# Allegro board OpenCellular_Connect-1_LED_Life-3_Board.brd
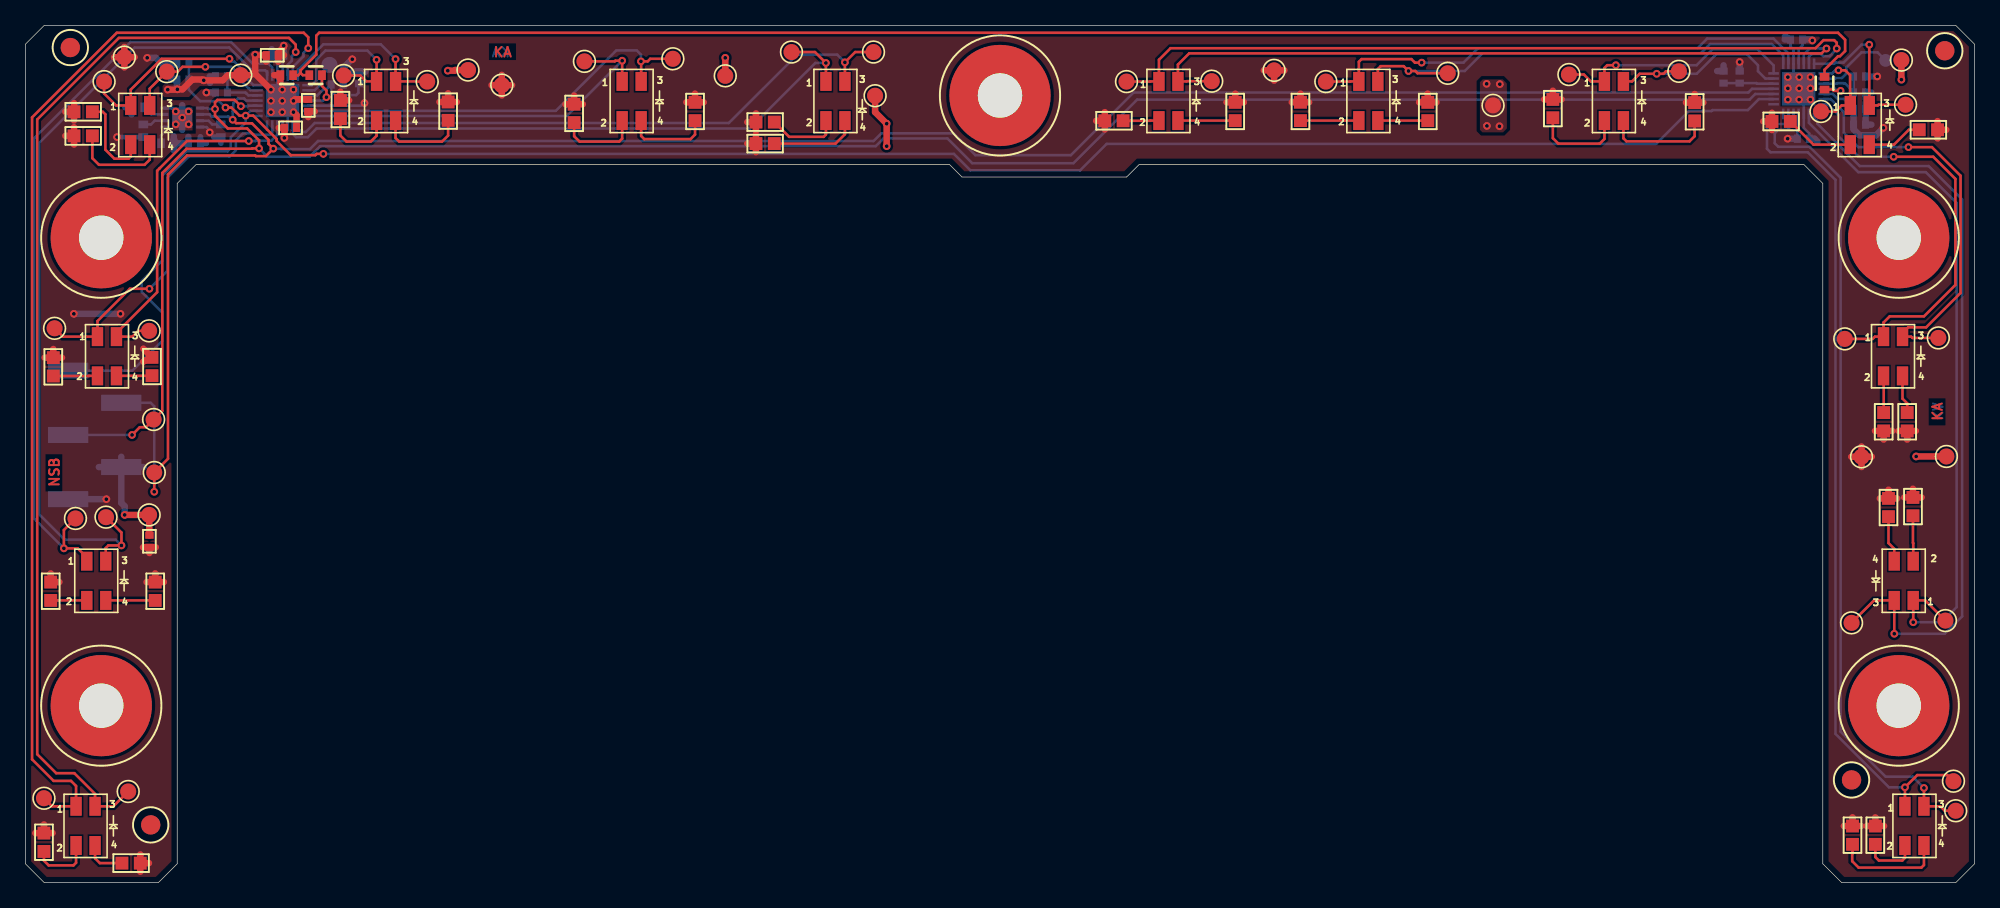
[diagram p0: board, top side]
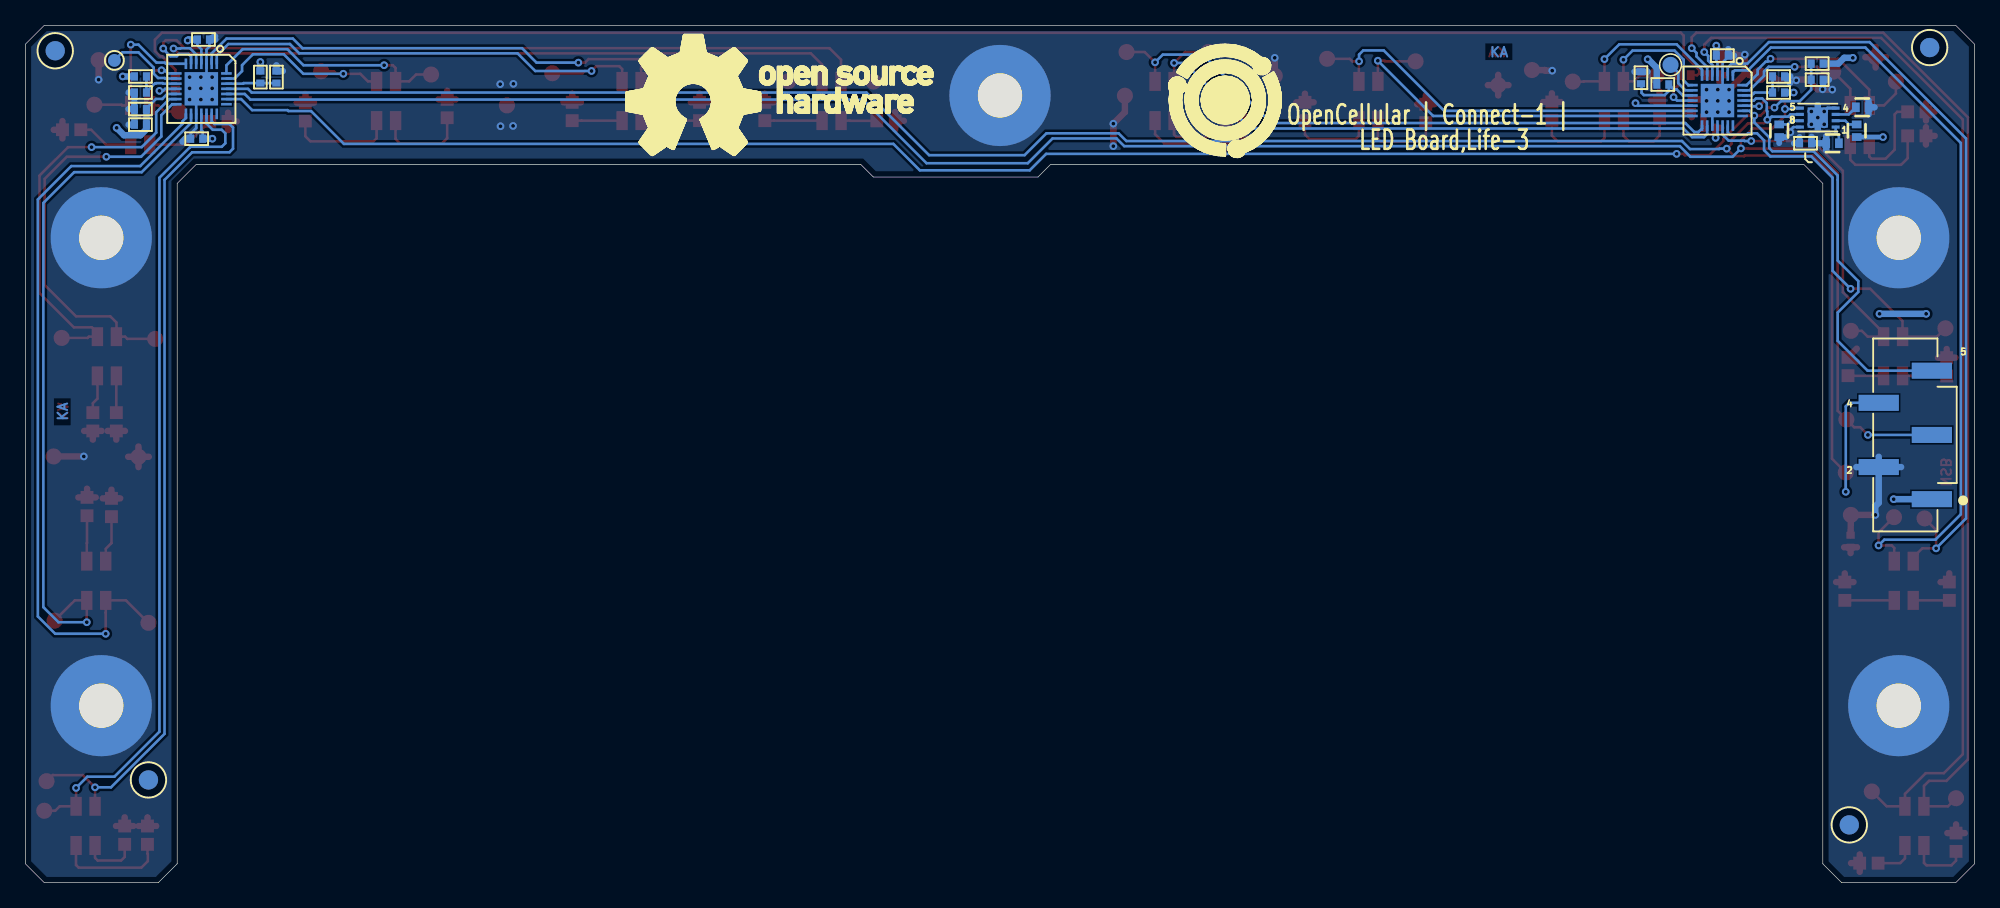
[diagram p1: board, bottom side, seen from below]

Outline 154 x 67.8 mm; copper layers: TOP, BOTTOM. Coordinates in mm from the lower left corner of the outline.
Outline path: 0,66.3 0,1.5 1.5,0 10.5,0 12,1.5 12,55.3 13.5,56.8 73,56.8 74,55.8 87,55.8 88,56.8 140.5,56.8 142,55.3 142,1.5 143.5,0 152.5,0 154,1.5 154,66.3 152.5,67.8 1.5,67.8 0,66.3

## Placement (name value [footprint] x y rotation side)
C1  1uF  [C0402]  19.51 65.43 180 top
C2  0.1uF  [C0402]  22.35 61.47 90 top
C3  0.1uF  [C0402]  12.45 63.5 180 bottom
C4  0.1uF  [C0402]  9.8 27 90 top
C5  0.1uF  [C0402]  20.95 59.69 0 top
C7  0.1uF  [C0402]  19.94 65.41 180 bottom
C8  1uF  [C0402]  144.91 61.18 0 bottom
C9  0.1uF  [C0402]  140.46 58.83 0 bottom
C10  0.1uF  [C0402]  144.91 59.94 0 bottom
C11  0.1uF  [C0402]  139.93 66.67 180 bottom
C1879  0.1uF  [C0402]  13.36 58.47 180 bottom
D8  LED  [SMP4-SBC]  4.76 4.49 0 top
D17  LED  [SMP4-SBC]  5.6 23.87 0 top
D18  LED  [SMP4-SBC]  6.45 41.63 0 top
D19  LED  [SMP4-SBC]  9.08 59.91 0 top
D20  LED  [SMP4-SBC]  28.5 61.81 0 top
D21  LED  [SMP4-SBC]  47.9 61.81 0 top
D22  LED  [SMP4-SBC]  64 61.81 0 top
D23  LED  [SMP4-SBC]  90.31 61.81 0 top
D24  LED  [SMP4-SBC]  125.5 61.81 0 top
D25  LED  [SMP4-SBC]  144.92 59.91 0 top
D26  LED  [SMP4-SBC]  147.55 41.63 0 top
D27  LED  [SMP4-SBC]  148.4 23.87 180 top
D28  LED  [SMP4-SBC]  149.24 4.49 0 top
D31  LED  [SMP4-SBC]  106.1 61.81 0 top
J1  5 pin Conn_0  [MOLEX_740990005]  3.38 30.33 270 bottom
MH2  MTG450_900  [MH_138D364P]  6 14 0 top
MH3  MTG450_900  [MH_138D364P]  6 51 0 top
MH4  MTG450_900  [MH_138D364P]  77 62.25 0 top
MH5  MTG450_900  [MH_138D364P]  148 51 0 top
MH6  MTG450_900  [MH_138D364P]  148 14 0 top
NOREF  -  []  88 56.8 0 top
NOREF#2  -  []  142 1.5 0 top
NOREF#3  -  []  1.5 0 90 top
NOREF#4  -  []  13.5 56.8 0 top
NOREF#5  -  []  74 55.8 0 top
NOREF#6  -  []  154 1.5 90 top
NOREF#7  -  []  12 1.5 90 top
NOREF#8  -  []  0 1.5 90 top
NOREF#9  -  []  0 66.3 0 top
NOREF#10  -  []  1.5 67.8 0 top
NOREF#11  -  []  0 1.5 0 top
NOREF#12  -  []  73 56.8 0 top
NOREF#13  -  [unnamed#2]  151.64 65.79 0 top
NOREF#14  -  []  142 1.5 90 top
NOREF#15  -  [unnamed#2]  3.56 66.04 0 top
NOREF#16  -  [unnamed#2]  9.91 4.57 0 top
NOREF#17  -  []  143.5 0 0 top
NOREF#18  -  [unnamed#2]  144.27 8.13 0 top
NOREF#19  -  []  1.5 0 0 top
NOREF#20  -  []  152.5 0 90 top
NOREF#21  -  [unnamed#2]  3.56 66.04 180 bottom
NOREF#22  -  [unnamed#2]  151.64 65.79 180 bottom
NOREF#23  -  [unnamed#2]  144.27 8.13 180 bottom
NOREF#24  -  [unnamed#2]  9.91 4.57 180 bottom
R2  10K  [R0402]  24.64 63.12 180 bottom
R3  10K  [R0402]  15.49 62.48 0 bottom
R4  10K  [R0402]  15.49 63.75 180 bottom
R5  10K  [R0402]  26.37 63.65 90 bottom
R13  82E  [R0603]  4.57 59.05 180 top
R25  10K  [R0402]  12.45 64.77 0 bottom
R27  82E  [R0603]  4.57 60.96 180 top
R28  82E  [R0603]  10.26 23.05 90 top
R29  82E  [R0603]  2.01 23.05 90 top
R30  82E  [R0603]  8.36 1.55 0 top
R31  82E  [R0603]  1.47 3.2 90 top
R32  82E  [R0603]  33.4 61.01 90 top
R33  82E  [R0603]  24.89 61.14 90 top
R34  82E  [R0603]  43.36 60.83 90 top
R41  82E  [R0603]  52.91 60.99 90 top
R42  10K  [R0402]  144.91 63.75 180 bottom
R43  10K  [R0402]  135.43 63.7 270 bottom
R44  10K  [R0402]  134.16 63.7 90 bottom
R45  10K  [R0402]  144.91 62.48 0 bottom
R76  82E  [R0603]  58.45 60.15 180 top
R77  82E  [R0603]  58.45 58.45 180 top
R78  82E  [R0603]  2.21 40.79 90 top
R79  82E  [R0603]  10.01 40.82 90 top
R80  82E  [R0603]  120.68 61.21 90 top
R81  82E  [R0603]  131.88 60.96 90 top
R82  82E  [R0603]  100.74 60.99 90 top
R83  82E  [R0603]  110.79 60.99 90 top
R84  82E  [R0603]  86 60.25 180 top
R85  82E  [R0603]  95.58 60.99 90 top
R86  82E  [R0603]  138.71 60.2 180 top
R87  82E  [R0603]  150.34 59.54 0 top
R88  82E  [R0603]  146.15 3.76 90 top
R89  82E  [R0603]  144.35 3.76 90 top
R90  82E  [R0603]  149.12 29.74 90 top
R91  82E  [R0603]  147.19 29.67 90 top
R92  82E  [R0603]  146.81 36.45 270 top
R93  82E  [R0603]  148.67 36.45 270 top
R10237  10K  [RC0402]  15.44 59.46 90 bottom
R10239  10K  [RC0402]  8.89 61.32 180 bottom
R10240  10K  [RC0402]  9.32 59.46 90 bottom
R10241  10K  [RC0402]  11.23 58.47 0 bottom
R10339  0  [RC0402]  22.94 63.86 180 top
R10340  0  [RC0402]  142.14 63.22 90 top
R10341  10K  [RC0402]  20.65 63.86 180 top
TP1  ?  [TP_50]  7.82 65.28 0 top
TP2  ?  [TP_50]  67.13 62.23 0 top
TP3  ?  [TP_50]  115.95 61.47 0 top
TP4  ?  [TP_50]  10.13 36.63 0 top
TP5  ?  [TP_50]  10.19 32.44 0 top
TP6  ?  [TP_50]  151.76 33.71 0 top
TP7  ?  [TP_50]  9.78 29.08 0 top
TP8  ?  [TP_50]  24.03 64.67 270 bottom
TP9  T POINT R  [TP_RND_1MM_SMD]  146.96 65.02 90 bottom
TP10  ?  [TP_50]  34.98 64.26 0 top
TP11  ?  [TP_50]  55.3 63.8 0 top
TP12  ?  [TP_50]  148.21 65.05 0 top
TP13  ?  [TP_50]  17.02 63.86 0 top
TP14  ?  [TP_50]  98.65 64.24 0 top
TP15  ?  [TP_50]  145.06 33.68 0 top
TP16  ?  [TP_50]  37.64 63.07 0 top
TP17  ?  [TP_50]  6.22 63.35 0 top
TP18  ?  [TP_50]  11.18 64.14 0 top
TP19  ?  [TP_50]  3.96 28.8 0 top
TP20  ?  [TP_50]  6.38 28.91 0 top
TP21  ?  [TP_50]  1.47 6.68 0 top
TP22  ?  [TP_50]  8.13 7.21 0 top
TP23  ?  [TP_50]  25.15 63.83 0 top
TP24  ?  [TP_50]  31.75 63.35 0 top
TP25  ?  [TP_50]  9.78 43.64 0 top
TP26  ?  [TP_50]  2.31 43.84 0 top
TP27  ?  [TP_50]  67.01 65.68 0 top
TP28  ?  [TP_50]  60.53 65.68 0 top
TP29  ?  [TP_50]  51.16 65.15 0 top
TP30  ?  [TP_50]  44.17 64.95 0 top
TP31  ?  [TP_50]  121.95 63.91 0 top
TP32  ?  [TP_50]  130.63 64.16 0 top
TP33  ?  [TP_50]  102.74 63.35 0 top
TP34  ?  [TP_50]  112.37 64.01 0 top
TP35  ?  [TP_50]  87 63.35 0 top
TP36  ?  [TP_50]  93.73 63.38 0 top
TP37  ?  [TP_50]  141.86 60.99 0 top
TP38  ?  [TP_50]  148.54 61.52 0 top
TP39  ?  [TP_50]  152.32 8.03 0 top
TP40  ?  [TP_50]  152.5 5.69 0 top
TP41  ?  [TP_50]  151.69 20.73 0 top
TP42  ?  [TP_50]  144.27 20.55 0 top
TP43  ?  [TP_50]  151.13 43.08 0 top
TP44  ?  [TP_50]  143.74 43 0 top
U1  SX1509BIULTRT  [QFN29_0P4_4X4]  20.32 61.85 270 bottom
U2  SX1509BIULTRT  [QFN29_0P4_4X4]  140.09 62.78 270 bottom
U212  SE98ATP,547  [SON50P300X200X80-9N_NXP]  12.4 60.5 90 bottom

## Library data of the parts
C1 C8 = CAP CER 1UF 16V X6S 0402
C2-C5 C7 C9-C11 = CAP CER 0.1UF 16V X7R 0402
C1879 = CAP_CER_0.1UF_10V_10%_X5R_0402
D8 D17-D28 D31 = SMP4-SBC
J1 = 5 pin Conn_0
MH2-MH6 = Mounting_Hole_0
R2-R5 R25 R42-R45 R10341 = RES_10K_0402_63mW
R13 R27-R34 R41 R76-R93 = RES SMD 330 OHM 5% 1/10W 0603
R10237 R10239-R10241 = R_1
R10339 R10340 = RES_0.0_OHM_1/16W_0402_SMD
TP1-TP44 = T POINT R
U1 U2 = SX1509BIULTRT
U212 = SE98ATP,547_3

## Footprints (pads in the part's own frame, mm; a bottom-side part is the same pattern mirrored in y, then rotated)
C0402
  rect 0.559x0.66 smd: 1(-0.475,0) 2(0.475,0)
MH_138D364P
  round 8 hole 3.505: 1(0,0)
MOLEX_740990005
  rect 1.27x3.18 smd: 1(0,0) 2(-2.54,-4.2) 3(-5.08,0) 4(-7.62,-4.2) 5(-10.16,0)
QFN29_0P4_4X4
  rect 0.838x0.203 smd: 1(-1.981,1.219) 2(-1.981,0.813) 3(-1.981,0.406) 4(-1.981,0) 5(-1.981,-0.406) 6(-1.981,-0.813) 7(-1.981,-1.219) 15(1.981,-1.219) 16(1.981,-0.813) 17(1.981,-0.406) 18(1.981,0) 19(1.981,0.406) 20(1.981,0.813) 21(1.981,1.219)
  rect 0.203x0.838 smd: 8(-1.219,-1.981) 9(-0.813,-1.981) 10(-0.406,-1.981) 11(0,-1.981) 12(0.406,-1.981) 13(0.813,-1.981) 14(1.219,-1.981) 22(1.219,1.981) 23(0.813,1.981) 24(0.406,1.981) 25(0,1.981) 26(-0.406,1.981) 27(-0.813,1.981) 28(-1.219,1.981)
  rect 2.642x2.642 smd: 29(0,0)
R0402
  rect 0.559x0.66 smd: 1(-0.475,0) 2(0.475,0)
R0603
  rect 1.016x1.016 smd: 1(-0.725,0) 2(0.725,0)
RC0402
  rect 0.61x0.762 smd: 1(-0.5,0) 2(0.5,0)
SMP4-SBC
  rect 0.9x1.5 smd: 1(-0.75,1.55) 2(-0.75,-1.55) 3(0.75,1.55) 4(0.75,-1.55)
SON50P300X200X80-9N_NXP
  rect 0.25x0.625 smd: 1(-0.75,-1.412) 2(-0.25,-1.412) 3(0.25,-1.412) 4(0.75,-1.412) 5(0.75,1.412) 6(0.25,1.412) 7(-0.25,1.412) 8(-0.75,1.412)
  rect 1.6x1.6 smd: 9(0,0)
TP_50
  round 1.27 smd: 1(0,0)
TP_RND_1MM_SMD
  round 1.016 smd: 1(0,0)
unnamed#2
  round 1.524 smd: 1(0,0)

## Nets
GND_POWER: C1.2 C2.2 C3.2 C4.2 C5.2 C7.2 C8.2 C9.2 C10.2 C11.2 C1879.2(B[0]) J1.2 MH2.1 MH3.1 MH4.1 MH5.1 MH6.1 R4.2 R5.2 R44.2 R45.2 R10239.2(B[0]) R10241.2(B[0]) R10341.2 TP2.1(TP) TP3.1(TP) TP6.1(TP) TP7.1(TP) TP10.1(TP) TP11.1(TP) TP12.1(TP) TP13.1(TP) U1.3(GND#3) U1.17(GND#17) U1.29(PAD) U2.3(GND#3) U2.17(GND#17) U2.29(PAD) U212.4(VSS) U212.9(TP)
VDDM: C1.1 C2.1 C4.1 C5.1 C7.1 C8.1 C9.1 C10.1 C11.1 C1879.1(A[0]) J1.1 R2.1 R3.1 R13.2 R25.1 R27.2 R28.2 R29.2 R30.2 R31.2 R32.2 R33.2 R34.2 R41.2 R42.1 R43.1 R76.2 R77.2 R78.2 R79.2 R80.2 R81.2 R82.2 R83.2 R84.2 R85.2 R86.2 R87.2 R88.2 R89.2 R90.2 R91.2 R92.2 R93.2 R10237.1(A[0]) R10240.1(A[0]) TP1.1(TP) TP14.1(TP) TP15.1(TP) TP16.1(TP) U1.4(VCC1) U1.12(VDDM) U1.18(VCC2) U2.4(VCC1) U2.12(VDDM) U2.18(VCC2) U212.8(VDD)
EXP_NINT: TP8.1(TP) U1.9(NINT)
EXP_NRESET: C3.1 J1.5 R25.2 U1.23(NRESET) U2.23(NRESET)
I2C_SCL: J1.4 TP5.1(TP) U1.25(SCL) U2.25(SCL) U212.6(SCL)
I2C_SDA: J1.3 TP4.1(TP) U1.24(SDA) U2.24(SDA) U212.5(SDA)
IO2[0]_R: D24.3(C_R) TP32.1(TP) U2.27(I/O[0])
IO2[1]_R: D24.1(C_G) TP31.1(TP) U2.28(I/O[1])
IO2[2]_R: D31.3(C_R) TP34.1(TP) U2.1(I/O[2])
IO2[3]_R: D31.1(C_G) TP33.1(TP) U2.2(I/O[3])
IO2[4]_R: D23.3(C_R) TP36.1(TP) U2.5(I/O[4])
IO2[5]_R: D23.1(C_G) TP35.1(TP) U2.6(I/O[5])
IO2[6]_R: D25.3(C_R) TP38.1(TP) U2.7(I/O[6])
IO2[7]_R: D25.1(C_G) TP37.1(TP) U2.8(I/O[7])
IO2[8]_R: D26.3(C_R) TP43.1(TP) U2.13(I/O[8])
IO2[9]_R: D26.1(C_G) TP44.1(TP) U2.14(I/O[9])
IO2[10]_R: D27.3(C_R) TP42.1(TP) U2.15(I/O[10])
IO2[11]_R: D27.1(C_G) TP41.1(TP) U2.16(I/O[11])
IO2[12]_R: D28.3(C_R) TP40.1(TP) U2.19(I/O[12])
IO2[13]_R: D28.1(C_G) TP39.1(TP) U2.20(I/O[13])
IO2_ADDR0: R43.2 R44.1 U2.26(ADDR0)
IO2_ADDR1: R42.2 R45.1 U2.10(ADDR1)
IO2_EXP_NINT: TP9.1(TP) U2.9(NINT)
IO[0]_R: D19.3(C_R) TP18.1(TP) U1.27(I/O[0])
IO[1]_R: D19.1(C_G) TP17.1(TP) U1.28(I/O[1])
IO[2]_R: D17.3(C_R) TP20.1(TP) U1.1(I/O[2])
IO[3]_R: D17.1(C_G) TP19.1(TP) U1.2(I/O[3])
IO[4]_R: D8.3(C_R) TP22.1(TP) U1.5(I/O[4])
IO[5]_R: D8.1(C_G) TP21.1(TP) U1.6(I/O[5])
IO[6]_R: D20.3(C_R) TP24.1(TP) U1.7(I/O[6])
IO[7]_R: D20.1(C_G) TP23.1(TP) U1.8(I/O[7])
IO[8]_R: D21.3(C_R) TP29.1(TP) U1.13(I/O[8])
IO[9]_R: D21.1(C_G) TP30.1(TP) U1.14(I/O[9])
IO[10]_R: D22.3(C_R) TP27.1(TP) U1.15(I/O[10])
IO[11]_R: D22.1(C_G) TP28.1(TP) U1.16(I/O[11])
IO[12]_R: D18.3(C_R) TP25.1(TP) U1.19(I/O[12])
IO[13]_R: D18.1(C_G) TP26.1(TP) U1.20(I/O[13])
IO_ADDR0: R3.2 R4.1 U1.26(ADDR0)
IO_ADDR1: R2.2 R5.1 U1.10(ADDR1)
LED1_G: D19.2(A_G) R27.1
LED1_R: D19.4(A_R) R13.1
LED2_G: D17.2(A_G) R29.1
LED2_R: D17.4(A_R) R28.1
LED3_G: D8.2(A_G) R31.1
LED3_R: D8.4(A_R) R30.1
LED4_G: D20.2(A_G) R33.1
LED4_R: D20.4(A_R) R32.1
LED5_G: D21.2(A_G) R34.1
LED5_R: D21.4(A_R) R41.1
LED6_G: D22.2(A_G) R76.1
LED6_R: D22.4(A_R) R77.1
LED7_G: D18.2(A_G) R78.1
LED7_R: D18.4(A_R) R79.1
LED8_G: D24.2(A_G) R80.1
LED8_R: D24.4(A_R) R81.1
LED9_G: D31.2(A_G) R82.1
LED9_R: D31.4(A_R) R83.1
LED10_G: D23.2(A_G) R84.1
LED10_R: D23.4(A_R) R85.1
LED11_G: D25.2(A_G) R86.1
LED11_R: D25.4(A_R) R87.1
LED12_G: D26.2(A_G) R92.1
LED12_R: D26.4(A_R) R93.1
LED13_G: D27.2(A_G) R90.1
LED13_R: D27.4(A_R) R91.1
LED14_G: D28.2(A_G) R88.1
LED14_R: D28.4(A_R) R89.1
OSCIO: R10339.2(B[0]) R10340.2(B[0]) R10341.1
N370075: R10339.1(A[0]) U1.11(OSCIO)
N370232: R10340.1(A[0]) U2.11(OSCIO)
N407515: R10237.2(B[0]) U212.7(NEVENT)
N407533: R10239.1(A[0]) U212.3(A2)
N407541: R10241.1(A[0]) U212.1(A0)
N407575: R10240.2(B[0]) U212.2(A1)

Pads without a net: NOREF#13 1; NOREF#15 1; NOREF#16 1; NOREF#18 1; NOREF#21 1; NOREF#22 1; NOREF#23 1; NOREF#24 1; U1 21 22; U2 21 22

## Via types
v1: diameter 0.61, hole 0.305, TOP to BOTTOM, 94 vias

## Routing (per net, layer and track width the routed paths; a pad name or vN(x,y) marks a point on that pad's centre or on a via; arc(x,y) is an arc through that point)
GND_POWER: length 69.7
  TOP w0.508: v1(18.16,65.48) 18.16,63.96 v1(19.41,62.71) ; C5.2 21.43,60.69 v1(21.18,60.93) ; 18.57,65.43 C1.2 19.03,64.92 ; v1(68.05,58.24) v1(68.05,60.02) 67.13,60.93 TP2.1 ; v1(11.25,62.71) 12.04,62.71 v1(12.01,62.74) 12.42,62.74 13.19,63.51 13.94,63.51 14,63.45 v1(14.1,63.45) 15.6,63.45 16,63.86 ; 20.15,63.3 R10341.2 19.67,63.86 ; 16.21,63.86 TP13.1 17.83,63.86 ; TP11.1 v1(55.3,65.23) ; TP12.1 v1(148.21,63.5) ; v1(21.18,61.82) 21.31,61.95 21.63,61.95 21.64,61.94 C2.2 ; TP6.1 v1(149.38,33.71) ; C4.2 TP7.1 v1(7.85,29.08) ; TP10.1 33.96,64.26 33.91,64.21 v1(33.38,64.21)
  BOTTOM w0.203: C7.2 19.46,65.31 19.91,64.86 U1.3 19.91,62.26 U1.29 20.73,61.44 U1.17 ; C9.2 140.94,59.24 140.5,59.68 U2.17 140.5,62.37 U2.29 139.69,63.18 U2.3 139.69,65.88 139.45,66.12 C11.2
  BOTTOM w0.254: v1(11.89,60.99) 11.62,61.25 U212.4
  BOTTOM w0.508: R10239.2 8.39,61.87 ; R10239.2 8.39,60.76 ; R10239.2 7.91,61.32 ; 14.59,63.25 R4.2 14.56,63.75 ; 11.73,57.91 R10241.2 ; R10241.2 11.73,59.03 ; R10241.2 12.21,58.47 ; 145.38,61.98 R45.2 145.84,62.48 ; 145.38,60.45 C10.2 145.84,59.94 ; 12.43,58.47 C1879.2 12.89,58.98 ; 134.16,64.64 R44.2 133.65,64.18 ; J1.2 9.35,32.87 ; J1.2 7.58,30.04 7.85,29.77 v1(7.85,29.08) ; J1.2 5.81,32.87 ; J1.2 7.58,33.68 ; 19.01,65.41 C7.2 19.46,65.91 ; 145.38,60.67 C8.2 ; C8.2 145.38,61.68 ; C8.2 145.84,61.18 ; 12.4,59.52 v1(12.4,60.5) 12.4,61.48 ; 26.87,64.13 R5.2 25.86,64.13 ; 139,66.67 C11.2 139.01,66.93 ; 11.51,63.5 C3.2 11.97,62.99 ; 141.58,58.6 141.35,58.83 C9.2
  vias: v1(11.89,59.97) v1(12.9,60.99) v1(12.9,59.97) v1(19.41,61.82) v1(19.41,60.93) v1(20.29,62.71) v1(20.29,61.82) v1(20.29,60.93) v1(21.18,62.71) v1(115.44,63.17) v1(115.47,59.84) v1(116.48,63.14) v1(116.46,59.82) v1(139.24,63.7) v1(139.24,62.81) v1(139.24,61.93) v1(140.13,63.7) v1(140.13,62.81) v1(140.13,61.93) v1(141.02,63.7) v1(141.02,62.81) v1(141.02,61.93)
VDDM: length 113.3
  TOP w0.508: 37.64,62.26 TP16.1 ; TP16.1 37.64,63.88 ; TP16.1 38.46,63.07 ; TP16.1 36.83,63.07 ; 97.84,64.24 TP14.1 ; TP14.1 99.47,64.24 ; TP14.1 98.65,63.42 ; R31.2 2.16,3.93 ; R31.2 1.47,4.61 ; R31.2 0.79,3.93 ; 2.69,23.77 R29.2 2.01,24.46 ; 9.3,26.53 C4.1 ; C4.1 9.8,26.07 ; C4.1 10.31,26.53 ; 7.82,64.47 TP1.1 ; TP1.1 7.82,66.09 ; TP1.1 8.64,65.28 ; TP1.1 7.01,65.28 ; R32.2 34.09,61.74 ; R32.2 32.72,61.74 ; R32.2 33.4,62.42 ; 3.16,60.96 R27.2 ; R27.2 3.85,61.65 ; R27.2 3.85,60.27 ; 110.11,61.71 R83.2 ; R83.2 111.48,61.71 ; R83.2 110.79,62.4 ; R34.2 44.04,61.56 ; R34.2 42.67,61.56 ; R34.2 43.36,62.24 ; R86.2 137.98,60.88 ; R86.2 137.3,60.2 ; R86.2 137.98,59.51 ; 57.72,57.76 R77.2 ; R77.2 57.03,58.45 ; R77.2 57.72,59.13 ; 9.32,41.2 R79.2 9.32,42.23 ; 20.48,59.18 C5.1 20.02,59.69 ; 57.03,60.15 R76.2 ; R76.2 57.72,59.46 ; R76.2 57.72,60.83 ; C1.1 19.98,65.66 20.41,66.09 v1(20.41,66.19) ; C1.1 20.44,65.43 ; C1.1 19.98,64.92 ; R90.2 149.12,31.15 ; R90.2 149.81,30.47 ; R90.2 148.44,30.47 ; R89.2 145.03,4.48 ; R89.2 144.35,5.17 ; R89.2 143.66,4.48 ; 22.86,60.99 C2.1 22.35,60.54 ; R93.2 149.35,35.72 ; R93.2 148.67,35.04 ; R93.2 147.98,35.72 ; 146.81,35.04 R92.2 ; R92.2 146.13,35.72 ; R92.2 147.5,35.72 ; 100.05,61.71 R82.2 ; R82.2 100.74,62.4 ; R82.2 101.42,61.71 ; R78.2 2.9,41.52 ; R78.2 1.52,41.52 ; R78.2 2.21,42.2 ; R87.2 151.75,59.54 ; R87.2 151.07,58.85 ; R87.2 151.07,60.22 ; 25.58,61.86 R33.2 24.89,62.55 ; R85.2 95.58,62.4 ; R85.2 96.27,61.71 ; R85.2 94.89,61.71 ; R30.2 9.77,1.55 ; R30.2 9.08,2.24 ; R30.2 9.08,0.86 ; R88.2 146.15,5.17 ; R88.2 145.47,4.48 ; R88.2 146.84,4.48 ; TP15.1 145.06,34.49 ; TP15.1 145.06,32.87 ; TP15.1 145.87,33.68 ; TP15.1 144.25,33.68 ; 146.51,30.39 R91.2 ; R91.2 147.88,30.39 ; R91.2 147.19,31.08 ; R80.2 121.36,61.94 ; R80.2 120.68,62.62 ; R80.2 119.99,61.94 ; R41.2 52.91,62.4 ; R41.2 53.59,61.71 ; R41.2 52.22,61.71 ; 131.19,61.68 R81.2 ; R81.2 131.88,62.37 ; R81.2 132.56,61.68 ; 84.59,60.25 R84.2 ; R84.2 85.28,60.93 ; R84.2 85.28,59.56 ; R28.2 10.26,24.46 ; R28.2 10.95,23.77 ; R28.2 9.58,23.77 ; 3.85,58.37 R13.2 ; R13.2 3.16,59.05 ; R13.2 3.85,59.74
  BOTTOM w0.203: U2.4 140.09,65.91 140.4,66.22 C11.1 ; U212.8 14.31,59.75 14.57,59.5 v1(14.57,59.33) ; U2.18 140.09,59.5 139.99,59.39 C9.1 ; v1(20.47,58.9) 20.32,59.04 U1.18 ; C8.1 144.43,61.23 143.68,61.98 143.18,61.98 142.79,62.37 U2.12 ; U1.4 20.32,64.87 20.41,64.97 C7.1 ; U1.12 26.59,61.44 v1(26.8,61.65)
  BOTTOM w0.381: R10240.1 v1(7.25,58.96)
  BOTTOM w0.457: 14.29,58.47 C1879.1 13.84,58.98 ; 14.88,58.96 R10237.1 15.44,58.48
  BOTTOM w0.508: v1(3.84,44.98) v1(7.52,44.98) ; R25.1 10.77,64.77 10.31,65.23 v1(9.63,65.23) ; v1(146.79,59.69) 146.2,59.11 144.91,59.11 144.43,59.58 C10.1 C8.1 ; C9.1 v1(139.22,58.83) ; C7.1 v1(20.41,66.19) ; R3.1 v1(14.3,62.48) ; R42.1 v1(146.3,63.75) ; C11.1 141.1,66.67 v1(141.17,66.6) ; R43.1 v1(135.43,64.9) ; J1.1 v1(6.4,30.33) ; v1(25.83,65.12) 25.8,65.12 25.11,64.43 R2.1
EXP_NINT: length 3
  BOTTOM w0.203: TP8.1 23.42,64.06 23.42,63.22 22.86,62.66 U1.9
EXP_NRESET: length 165.7
  TOP w0.203: v1(23.55,57.63) 23.01,57.63 22.91,57.53 20.97,57.53 19.86,58.64 19.86,58.81 18.01,60.65 v1(17.41,60.65) 16.92,60.65 16.64,60.94 16.63,60.94 16.28,61.29 v1(15.82,61.29)
  BOTTOM w0.203: R25.2 C3.1 12.92,62.7 13.82,61.8 15.31,61.8 v1(15.82,61.29) ; U1.23 17.79,61.04 v1(17.41,60.65) 17.41,60.12 16.23,58.94 16.23,58.09 15.98,57.84 12.73,57.84 10.82,55.92 10.82,55.58 10.82,49.2 9.19,47.57 9.19,46.71 10.82,45.09 10.82,42.85 8.46,40.49 J1.5 ; v1(23.55,57.63) 73.36,57.63 74.65,56.33 83.33,56.33 85.42,58.42 128.83,58.42 131.43,61.02 133.22,61.02 133.29,61.09 136.08,61.09 136.95,61.96 U2.23
I2C_SCL: length 176.7
  TOP w0.203: v1(10.19,30.91) TP5.1 11.27,33.52 11.27,56 12.78,57.51 18.16,57.51 18.21,57.45 19,57.45 v1(19.59,58.05) 19.21,58.42 19.21,58.74 17.91,60.04 17.3,60.04 17.28,60.06 16.65,60.06 v1(16.38,60.33)
  BOTTOM w0.203: U212.6 14.55,60.75 14.73,60.57 16,60.57 16.02,60.55 16.08,60.55 16.3,60.33 v1(16.38,60.33) 16.38,60.99 16.43,61.04 16.43,61.65 16.78,62.01 17.29,62.01 17.45,61.85 U1.25 ; J1.4 9.91,37.95 10.19,37.67 v1(10.19,30.91) ; U2.25 136.41,62.78 136.12,62.48 87.55,62.48 82.6,57.53 75.06,57.53 73.33,59.26 67.63,59.26 67.02,58.65 23.12,58.65 22.49,58.01 20.19,58.01 20.16,58.05 v1(19.59,58.05)
I2C_SDA: length 169.9
  TOP w0.203: v1(17.04,61.4) 16.54,61.9 15.17,61.9 14.99,61.71 v1(14.99,61.18) 14.99,60.65 15.99,59.64 17.53,59.64 18.47,58.7 v1(18.47,58.06) 17.93,58.06 17.91,58.04 12.73,58.04 10.82,56.12 10.82,37.31 TP4.1 9.52,36.02 9.04,36.02 v1(8.43,35.41)
  BOTTOM w0.203: v1(14.99,61.18) 14.45,61.18 14.38,61.25 U212.5 ; U2.24 136.66,62.37 136.22,61.93 87.83,61.93 82.8,56.9 74.8,56.9 72.85,58.85 67.79,58.85 67.18,58.24 23.29,58.24 22.46,57.4 19.13,57.4 v1(18.47,58.06) ; v1(17.04,61.4) 17.57,61.4 17.61,61.44 U1.24 ; J1.3 v1(8.43,35.41)
IO2[0]_R: length 15.7
  TOP w0.203: TP32.1 129.61,64.16 129.41,63.97 v1(128.88,63.97) 127.53,63.97 126.93,63.36 D24.3
  BOTTOM w0.203: U2.27 137.46,63.59 136.88,64.18 136.88,64.65 136.02,65.51 133.58,65.51 132.04,63.97 v1(128.88,63.97)
IO2[1]_R: length 19.2
  TOP w0.203: TP31.1 123.13,63.91 123.67,63.36 D24.1 124.75,64.42 124.97,64.64 v1(125.65,64.64)
  BOTTOM w0.203: v1(125.65,64.64) 132.03,64.64 133.3,65.91 136.83,65.91 138.11,64.63 U2.28
IO2[2]_R: length 38.3
  TOP w0.203: D31.3 106.85,64.34 107.08,64.57 108.89,64.57 v1(109.27,64.19) 109.8,64.19 109.98,64.01 TP34.1
  BOTTOM w0.203: v1(109.27,64.19) 113.72,64.19 115.11,65.58 132.36,65.58 133.1,66.32 137.96,66.32 138.87,65.41 U2.1
IO2[3]_R: length 40.4
  TOP w0.203: v1(110.31,64.85) 109.78,64.85 109.5,65.13 105.56,65.13 105.35,64.91 105.35,64.34 D31.1 104.67,63.36 104.66,63.35 TP33.1
  BOTTOM w0.203: v1(110.31,64.85) 113.61,64.85 114.76,65.99 132.11,65.99 132.87,66.75 138.1,66.75 139.28,65.57 U2.2
IO2[4]_R: length 58.5
  TOP w0.203: TP36.1 91.75,63.38 91.74,63.36 D23.3 91.06,64.69 91.95,65.58 141.91,65.58 v1(142.29,65.96)
  BOTTOM w0.203: v1(142.29,65.96) 141.76,65.96 141.73,65.99 141,65.99 140.5,65.49 U2.5
IO2[5]_R: length 62.2
  TOP w0.203: TP35.1 88.86,63.35 88.88,63.36 D23.1 89.56,65.07 90.47,65.99 141.43,65.99 142.06,66.62 142.9,66.62 143.1,66.42 v1(143.1,65.96)
  BOTTOM w0.203: U2.6 140.91,65.33 141.11,65.53 141.86,65.53 142.04,65.35 142.54,65.35 142.9,65.71 142.9,65.76 v1(143.1,65.96)
IO2[6]_R: length 12.7
  TOP w0.203: v1(145.67,66.27) 145.67,65.74 145.67,65.73 D25.3 146.35,61.46 146.41,61.52 TP38.1
  BOTTOM w0.203: v1(145.67,66.27) 145.06,66.27 143.64,64.85 142.99,64.85 142.89,64.76 U2.7
IO2[7]_R: length 7.3
  TOP w0.203: v1(143.24,64.24) 143.77,64.24 144.16,63.86 144.16,62.45 144.17,62.44 D25.1 143.49,61.46 143.01,60.99 TP37.1
  BOTTOM w0.203: U2.8 142.74,64 142.98,64.24 143.23,64.24 v1(143.24,64.24)
IO2[8]_R: length 32.6
  TOP w0.203: TP43.1 149.08,43.08 148.98,43.18 D26.3 148.3,43.47 148.74,43.92 150.16,43.92 152.88,46.63 152.88,55.91 150.62,58.17 v1(148.77,58.17)
  BOTTOM w0.203: v1(148.77,58.17) 144.81,58.17 143.66,59.31 143.66,60.92 142.62,61.96 U2.13
IO2[9]_R: length 33.4
  TOP w0.203: v1(147.6,57.4) 150.72,57.4 152.48,55.65 152.48,47.27 149.99,44.79 147.29,44.79 146.8,44.3 D26.1 146.12,43.18 145.94,43 TP44.1
  BOTTOM w0.203: U2.14 142.39,61.56 143.26,60.69 143.26,59 144.86,57.4 v1(147.6,57.4)
IO2[10]_R: length 60.5
  TOP w0.203: v1(147.65,19.68) 147.65,21.34 147.65,21.35 D27.3 146.05,22.32 TP42.1
  BOTTOM w0.203: v1(147.65,19.68) 151.64,19.68 153.01,21.06 153.01,54.03 150.37,56.67 144.92,56.67 141.58,60.01 141.58,60.21 141.31,60.48 U2.15
IO2[11]_R: length 55.8
  TOP w0.203: v1(149.15,20.6) D27.1 150.09,22.32 TP41.1
  BOTTOM w0.203: U2.16 140.91,60.08 144.81,56.18 150.14,56.18 152.58,53.75 152.58,21.79 151.38,20.6 v1(149.15,20.6)
IO2[12]_R: length 66
  TOP w0.203: v1(149.99,7.49) D28.3 151.29,6.04 151.64,5.69 TP40.1
  BOTTOM w0.203: U2.19 139.69,60.03 139.19,59.54 138.48,59.54 138.2,59.26 138.2,58.47 138.48,58.19 140.94,58.19 140.97,58.17 140.99,58.17 143.41,55.74 143.41,11.94 146.96,8.38 149.1,8.38 v1(149.99,7.49)
IO2[13]_R: length 67.6
  TOP w0.203: TP39.1 151.84,8.51 149.46,8.51 v1(148.49,7.54) D28.1
  BOTTOM w0.203: U2.20 139.28,60.21 139.06,59.99 137.87,59.99 137.59,59.72 137.59,58.04 137.87,57.76 140.82,57.76 143,55.58 143,11.77 147.23,7.54 v1(148.49,7.54)
IO2_ADDR0: length 4
  BOTTOM w0.203: R44.1 R43.2 136.75,63.23 136.8,63.18 U2.26
IO2_ADDR1: length 3.9
  BOTTOM w0.203: 144.43,62.53 143.75,63.21 143.67,63.21 143.66,63.22 143.15,63.22 143.11,63.18 U2.10 ; 144.43,62.53 R45.1 ; 144.43,62.53 R42.2
IO2_EXP_NINT: length 6.3
  BOTTOM w0.203: TP9.1 146.33,65.66 145.06,65.66 143.87,64.47 143.87,64.23 143.85,64.21 143.85,63.97 143.51,63.63 142.98,63.63 142.94,63.59 U2.9
IO[0]_R: length 11.5
  TOP w0.203: v1(14.22,64.52) 12.42,64.52 12.04,64.14 TP18.1 9.83,62.79 D19.3
  BOTTOM w0.203: U1.27 17.79,62.66 17.62,62.82 16.64,63.81 16.64,64.16 16.28,64.52 v1(14.22,64.52)
IO[1]_R: length 16.8
  TOP w0.203: v1(16.13,65.15) 10.77,65.15 8.33,62.71 D19.1 7.17,61.46 6.22,62.41 TP17.1
  BOTTOM w0.203: v1(16.13,65.15) 16.36,64.92 16.51,64.92 17.14,64.29 17.14,63.94 18.02,63.07 U1.28
IO[2]_R: length 64.2
  TOP w0.203: D17.3 6.35,26.47 6.56,26.67 v1(7.59,26.67) 7.59,27.69 TP20.1
  BOTTOM w0.203: v1(7.59,26.67) 7.14,27.13 3.1,27.13 1.09,29.13 1.09,58.5 8.64,66.04 16.1,66.04 17.91,64.24 18.95,64.24 19.1,64.08 U1.1
IO[3]_R: length 62
  TOP w0.203: D17.1 4.85,25.72 4.14,26.44 v1(3.05,26.44) 3.05,27.89 TP19.1
  BOTTOM w0.203: U1.2 19.51,64.47 19.2,64.77 17.96,64.77 16.26,66.47 8.31,66.47 0.69,58.85 0.69,28.8 v1(3.05,26.44)
IO[4]_R: length 86.2
  TOP w0.203: v1(21.36,65.68) 21.36,66.27 20.83,66.8 7.39,66.8 0.94,60.35 0.94,10.16 2.44,8.66 3.87,8.66 5.51,7.02 D8.3 6.96,6.04 TP22.1
  BOTTOM w0.203: U1.5 20.73,64.67 21.06,65 21.06,65.38 v1(21.36,65.68)
IO[5]_R: length 87.8
  TOP w0.203: TP21.1 2.11,6.04 D8.1 4.01,7.65 3.61,8.05 2.24,8.05 0.53,9.75 0.53,60.52 7.22,67.21 22,67.21 22.35,66.85 v1(22.35,65.99)
  BOTTOM w0.203: U1.6 21.13,64.5 21.97,65.34 21.97,65.61 v1(22.35,65.99)
IO[6]_R: length 13.8
  TOP w0.203: v1(29.25,65.13) D20.3 30.87,63.36 30.89,63.35 TP24.1
  BOTTOM w0.203: v1(29.25,65.13) 28.08,66.29 23.55,66.29 21.54,64.29 U1.7
IO[7]_R: length 12.3
  TOP w0.203: v1(27.75,65.07) D20.1 26.93,63.36 26.47,63.83 TP23.1
  BOTTOM w0.203: v1(27.75,65.07) 27.03,65.8 23.71,65.8 22.99,65.07 22.99,63.44 22.62,63.07 U1.8
IO[8]_R: length 33.2
  TOP w0.203: TP29.1 49.37,65.15 49.17,64.95 v1(48.63,64.95) 48.63,64.73 48.65,64.71 D21.3
  BOTTOM w0.203: U1.13 41.91,61.04 46.69,65.81 48.3,65.81 48.63,65.48 v1(48.63,64.95)
IO[9]_R: length 31.3
  TOP w0.203: TP30.1 46.57,64.95 46.62,65 v1(47.15,65) D21.1
  BOTTOM w0.203: U1.14 42.78,60.63 v1(47.15,65)
IO[10]_R: length 50.4
  TOP w0.203: D22.3 v1(64.75,64.87) 65.56,65.68 TP27.1
  BOTTOM w0.203: v1(64.75,64.87) 64.14,65.48 60.99,65.48 55.58,60.07 22.86,60.07 22.15,59.36 21.83,59.36 21.54,59.65 U1.15
IO[11]_R: length 49.8
  TOP w0.203: TP28.1 62.38,65.68 v1(63.25,64.82) 63.25,63.36 D22.1
  BOTTOM w0.203: v1(63.25,64.82) 62.41,64.82 57.23,59.64 23,59.64 22.32,58.95 21.39,58.95 21.13,59.21 U1.16
IO[12]_R: length 28.6
  TOP w0.203: TP25.1 8.92,43.64 8.46,43.18 D18.3 7.2,43.48 10.41,46.69 10.41,56.29 10.63,56.51 12.77,58.65 v1(17.65,58.65)
  BOTTOM w0.203: U1.19 19.91,59.15 19.43,58.67 18.21,58.67 18.19,58.65 v1(17.65,58.65)
IO[13]_R: length 30.3
  TOP w0.203: TP26.1 2.97,43.18 D18.1 5.7,44.41 8.26,46.96 v1(9.8,46.96)
  BOTTOM w0.203: v1(9.8,46.96) 11.23,48.39 11.23,55.75 12.9,57.43 16.14,57.43 16.64,57.92 16.64,58.7 17.2,59.26 17.91,59.26 18.02,59.14 19.33,59.14 19.51,59.32 U1.20
IO_ADDR0: length 3.7
  BOTTOM w0.203: R4.1 R3.2 17.39,62.48 17.46,62.42 17.62,62.26 U1.26
IO_ADDR1: length 5.8
  BOTTOM w0.203: U1.10 23.06,62.26 23.55,62.74 23.78,62.74 R2.2 24.16,62.6 24.49,62.28 26.14,62.28 26.31,62.46 26.31,63.13 R5.1
LED1_G: length 7.2
  TOP w0.203: D19.2 8.33,57.43 8.15,57.25 7.04,57.25 6.32,57.96 6.32,60.76 6.12,60.96 R27.1
LED1_R: length 7.9
  TOP w0.203: R13.1 5.3,57.29 5.82,56.77 9.42,56.77 9.83,57.18 D19.4
LED2_G: length 2.8
  TOP w0.203: D17.2 R29.1
LED2_R: length 3.9
  TOP w0.203: D17.4 R28.1
LED3_G: length 4.9
  TOP w0.203: R31.1 1.47,1.74 1.84,1.37 3.8,1.37 4.01,1.57 D8.2
LED3_R: length 3.3
  TOP w0.203: R30.1 5.89,1.55 5.51,1.93 D8.4
LED4_G: length 5.8
  TOP w0.203: R33.1 24.89,59.08 25.37,58.6 27.28,58.6 27.75,59.07 D20.2
LED4_R: length 7.1
  TOP w0.203: D20.4 29.25,58.89 29.54,58.6 32.92,58.6 33.4,59.08 R32.1
LED5_G: length 6.6
  TOP w0.203: D21.2 47.15,58.83 46.91,58.6 43.79,58.6 43.36,59.03 R34.1
LED5_R: length 6.8
  TOP w0.203: R41.1 52.91,59.16 52.55,58.8 48.9,58.8 48.65,59.05 D21.4
LED6_G: length 5.7
  TOP w0.203: R76.1 60.34,58.98 63.07,58.98 63.25,59.16 63.25,59.28 63.25,59.28 D22.2
LED6_R: length 7
  TOP w0.203: D22.4 64.75,59.19 64.01,58.45 R77.1
LED7_G: length 3.5
  TOP w0.203: R78.1 5.01,40.07 5.02,40.08 D18.2
LED7_R: length 2.8
  TOP w0.203: D18.4 9.99,40.08 R79.1
LED8_G: length 7.5
  TOP w0.203: D24.2 124.75,58.81 124.38,58.45 121.11,58.45 120.68,58.88 R80.1
LED8_R: length 8.5
  TOP w0.203: D24.4 126.25,58.87 126.49,58.62 131.47,58.62 131.88,59.03 R81.1
LED9_G: length 4.6
  TOP w0.203: D31.2 R82.1
LED9_R: length 3.9
  TOP w0.203: D31.4 110.06,60.26 110.06,60.26 R83.1
LED10_G: length 2.8
  TOP w0.203: R84.1 88.86,60.25 88.88,60.26 D23.2
LED10_R: length 4.5
  TOP w0.203: R85.1 94.84,60.26 94.84,60.26 D23.4
LED11_G: length 5.5
  TOP w0.203: D25.2 141.27,58.36 R86.1
LED11_R: length 4.4
  TOP w0.203: R87.1 148.8,59.54 147.62,58.36 D25.4
LED12_G: length 2.9
  TOP w0.203: D26.2 146.8,39.55 146.81,39.54 R92.1
LED12_R: length 3.1
  TOP w0.203: D26.4 148.3,38.28 148.67,37.91 R93.1
LED13_G: length 3.6
  TOP w0.203: R90.1 149.12,26.87 149.15,26.85 D27.2
LED13_R: length 3.7
  TOP w0.203: R91.1 147.19,26.85 147.65,26.4 D27.4
LED14_G: length 4.5
  TOP w0.203: R88.1 146.15,2.03 146.43,1.75 148.28,1.75 148.49,1.96 D28.2
LED14_R: length 8.9
  TOP w0.203: D28.4 149.99,1.4 149.79,1.19 144.83,1.19 144.32,1.7 144.32,2.27 144.35,2.3 R89.1
OSCIO: length 129.7
  TOP w0.203: 21.74,64.03 21.56,63.86 R10341.1 ; 21.74,64.03 21.92,63.86 R10339.2 ; 21.74,64.03 21.74,64.24 22.99,65.48 22.99,66.98 23.22,67.21 143.21,67.21 143.76,66.65 143.76,65.76 143.36,65.35 143.21,65.35 142.14,64.29 R10340.2
N370075: length 3.5
  TOP w0.203: R10339.1 23.44,63 23.79,62.65 v1(23.79,62.12)
  BOTTOM w0.203: v1(23.79,62.12) 23.52,61.85 U1.11
N370232: length 2.7
  TOP w0.203: v1(143.41,62.62) 142.87,62.62 142.77,62.72 R10340.1
  BOTTOM w0.203: U2.11 142.96,62.78 143.12,62.61 143.4,62.61 v1(143.41,62.62)
N407515: length 1.8
  BOTTOM w0.203: R10237.2 14.77,59.96 14.48,60.25 U212.7
N407533: length 1.8
  BOTTOM w0.203: R10239.1 9.95,60.75 U212.3
N407541: length 1.4
  BOTTOM w0.203: R10241.1 10.73,59.08 10.98,59.34 U212.1
N407575: length 1.8
  BOTTOM w0.203: R10240.2 9.93,59.96 10.22,60.25 U212.2

## Copper pours and planes (outline as drawn; the poured copper is in the pictures)
GND_POWER on TOP: 138.91,64.06 138.91,61.65 141.27,61.65 141.27,64.06
GND_POWER on TOP: 19.46,60.58 19.15,60.88 19.15,62.79 18.95,62.99 13.79,62.99 12.93,62.13 10.97,62.13 10.85,62.26 10.85,62.99 10.97,63.12 12.14,63.12 13.08,64.06 16.21,64.06 17.91,65.76 19.33,65.76 19.33,64.49 19.46,64.36 20.32,64.36 20.65,64.03 20.65,63.47 20.57,63.47 20.57,63.35 20.7,63.35 21.41,62.64 21.41,60.86 21.13,60.58
GND_POWER on TOP: 11.61,61.14 11.61,59.49 13.21,59.49 13.21,61.14
GND_POWER on TOP: 114.91,59.54 114.91,63.3 115.14,63.53 116.71,63.53 117.04,63.2 117.04,59.64 116.74,59.33 115.11,59.33
GND_POWER on BOTTOM: 86.81,56.26 74.19,56.26 73.19,57.26 13.31,57.26 11.54,55.49 11.54,1.69 10.31,0.46 1.69,0.46 0.46,1.69 0.46,66.11 1.69,67.34 152.31,67.34 153.54,66.11 153.54,1.69 152.31,0.46 143.69,0.46 142.46,1.69 142.46,55.49 140.69,57.26 87.81,57.26 ; 12 cut-outs
VDDM on TOP: 1.69,67.34 152.31,67.34 153.54,66.11 153.54,1.69 152.31,0.46 143.69,0.46 142.46,1.69 142.46,55.49 140.69,57.26 87.81,57.26 86.81,56.26 74.19,56.26 73.19,57.26 13.31,57.26 11.54,55.49 11.54,1.69 10.31,0.46 1.69,0.46 0.46,1.69 0.46,66.11 ; 12 cut-outs
VDDM on BOTTOM: 13.39,59.74 13.39,58.37 13.6,58.15 15.81,58.15 16.03,58.37 16.03,58.95 16,58.98 16,59.26 15.77,59.49 14.94,59.49 14.61,59.82 13.46,59.82

## Text on the board
BOTTOM: KA
Ref Des/Silkscreen Bottom: 1 | LED Board,Life-3 | OpenCellular | Connect-1 |
TOP: KA | NSB
DIMENSION: Scoring | 700mils | 200mils | 0 | 93mils | Detail A | 50mils | board edge | Brd to Brd distance 400mil | Array size  X = 6.863 Y = 6.539" | Rail area 400mils | 31mils npt 10mils outside the board edge | 4 X 40mils Fiducials with 80mils solder mask opening both sides | 4 X 125mils npt holes with 135mil solder mask opening | See detail A | 0.059" | Scoring Detail | Scoring Web | 30 | 0.014"
User.6: DATE:28-12-2016 | DESIGNED AT: | CARD REF:OpenCellular lConnect-1 l LED Board, Life-3 | FILM LAYER: | PART NUMBER:232-000076
User.7: Layer1-Top
User.8: Layer2-Plane1
User.9: Layer3-Signal1
User.10: Layer2-Bottom
User.11: Solder Mask Top
User.12: Solder Mask Bottom
User.13: Solder Paste Top
User.14: Solder Paste Bottom
User.15: Silkscreen Top
User.16: Silkscreen Bottom
User.17: Assembly Top
User.18: Assembly Bottom
User.19: FAB_Details
User.21: PANEL
User.22: FAB NOTES: | 1. ALL DIMENSIONS ARE IN INCHES, UNLESS | OTHERWISE NOTED. | 2. THE PWB SHALL BE FABRICATED TO IPC-6012, | CLASS 2 AND WORKMANSHIP SHALL CONFORM TO | IPC-A-600, CLASS 2. CURRENT REVISIONS. | 3. BOARD MATERIAL SHALL BE VT47 | OR EQUIVALENT, RoHS COMPLIANT AND LEAD FREE | ASSEMBLY CAPABLE.  BOARD MATERIAL SHALL | MEET OR EXCEED IPC-4101B. COLOR: NATURAL. | 4. BOARD MATERIAL & CONSTRUCTION TO BE U.L. | APPROVED AND MARKED ON THE FINISHED BOARD. | 5. MINIMUM COPPER WALL THICKNESS OF PLATED-THRU | HOLES TO BE .001 INCH, WITH A MINIMUM | ANNULAR RING OF .002 INCH. | 6. OVERALL BOARD THICKNESS TO BE 1.5mm +/- 10% | AND APPLIES AFTER ALL LAMINATION AND PLATING | PROCESSES, MEASURED FROM COPPER TO COPPER. | 7. MAX. WARP & TWIST TO BE .0075 INCHES PER INCH. | 8. BOARD MUST BE ELECTRICALLY TESTED USING | SUPPLIED IPC-D-356 NETLIST. | 9. SILKSCREEN OUTLINE AND TEXT OVERLAPPING | WITH COPPER PAD TO BE REMOVED. | BOARD DIMENSION :UNITS ARE IN INCH[MM]. | 2. SOLDER MASK MATERIAL SHALL MEET ALL THE REQUIREMENTS OF | 3. SOLDERMASK ARTWORK MAY HAVE ZERO (0) OVERSIZED PADS. | FABRICATION VENDOR IS ALLOWED TO ADJUST THE COMPONENT | SOLDERMASK PADS TO MEET THEIR TOOLING REQUIREMENTS. | 4. APPLY LPI SILKSCREEN OR EQUIVALENT AS PER THE ARTWORK. | COLOR: BLACK. | TO IPC-SM-840, CLASS H. CURRENT REV | 1. PLATE ALL EXPOSED AREAS WITH ELECTROLESS NICKEL | PROCESS NOTES: | IMMERSION GOLD, NICKEL 3 TO 5 MICRONS AND | GOLD 0.05 TO 0.1 MICRONS. | COLOR: WHITE SOLDERMASK SHALL CONFORM
User.24: IMPEDANCE TABLE | Layers | --- | Single Ended | Trace Width | 50 ohms | (Mils) | Differential | 100 ohms | Spacing | 90 ohms
User.26: 1.9 Mils | 53.7 Mils | 0.8 Mils | -------------------------- | 2 LAYER STACK-UP DETAILS: | SOLDER MASK | L2_BOTTOM | L1_TOP | CORE | 59.055 Mils
User.27: FIGURE | SIZE | 12.0 | 138.0 | DRILL CHART: TOP to BOTTOM | ALL UNITS ARE IN MILS | TOLERANCE | +3.0/-3.0 | PLATED | QTY | 94 | 5
